# Altium PCB PeltierCore.PcbDoc
Units mil, origin at the board's own origin, x right, y up, seen from the top; angles counter-clockwise.
Board outline 6000 x 4000 mil, 2 copper layers (Top Layer, Bottom Layer); 1 components, 0 nets, 86 pads, 0 vias.
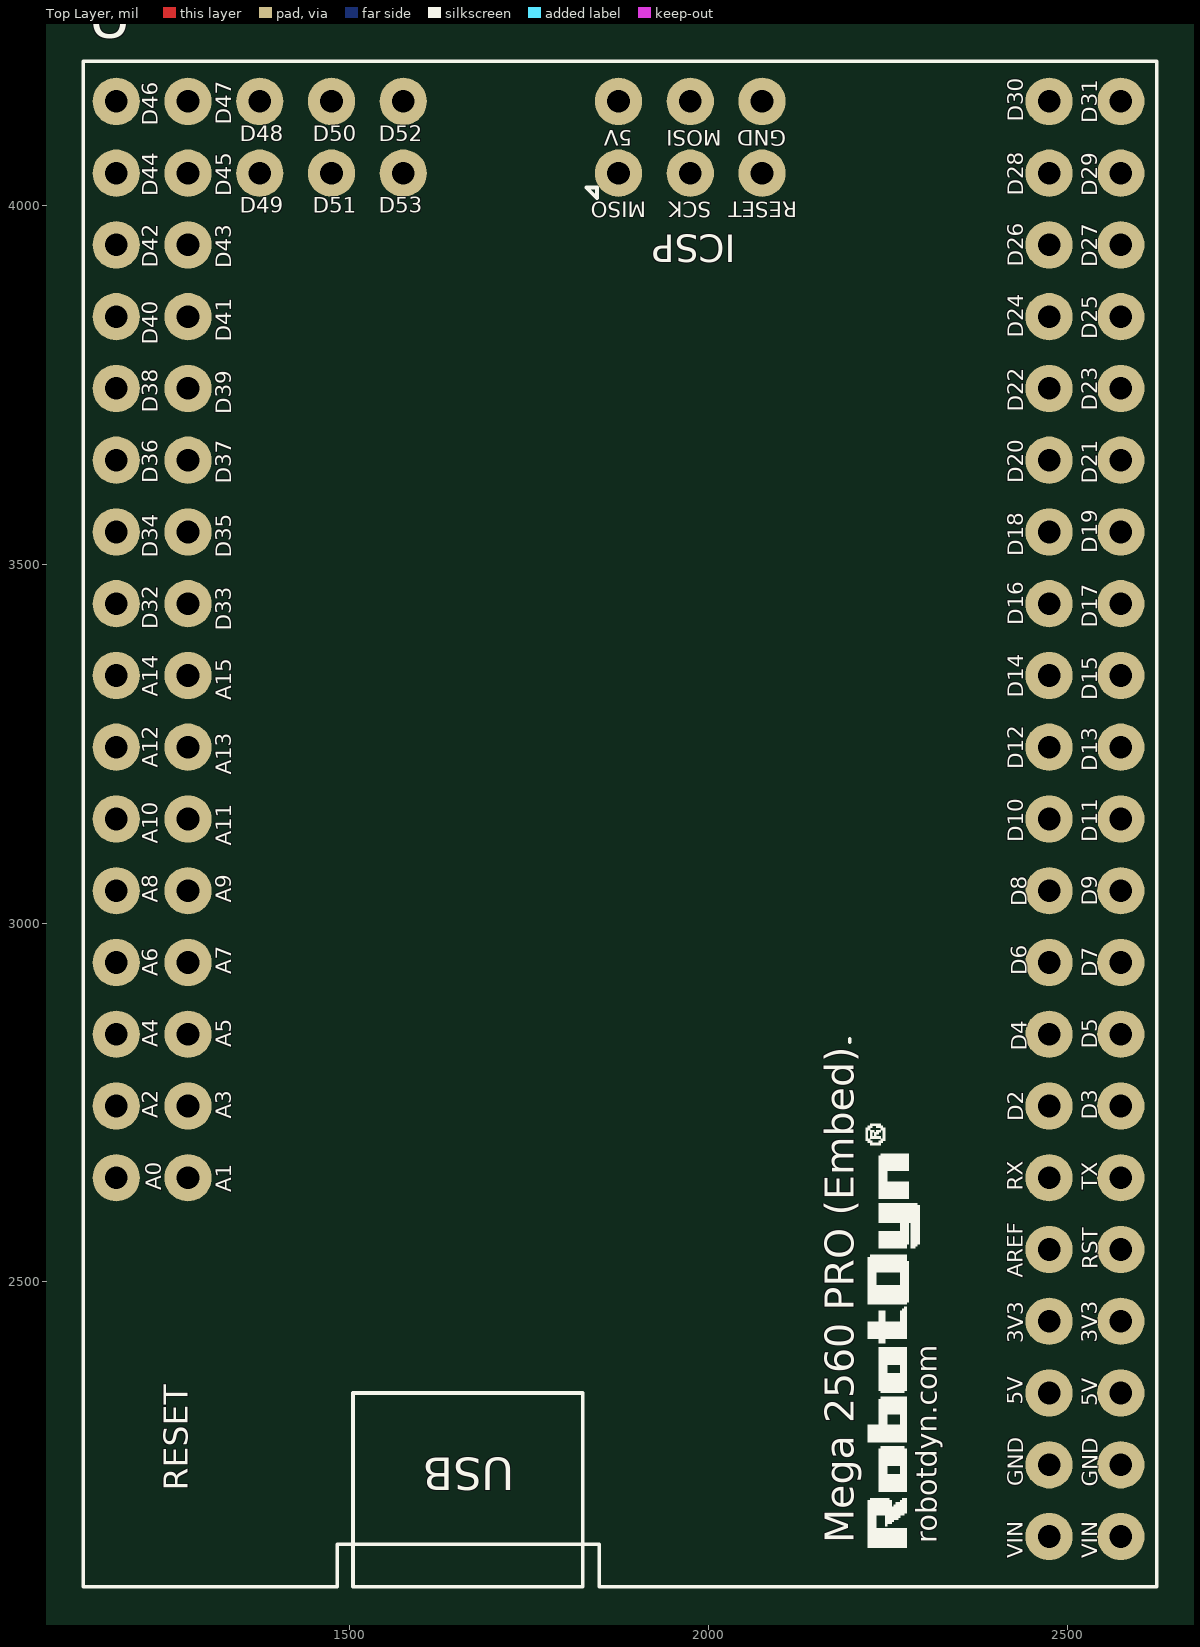
[diagram p0: Top Layer view]
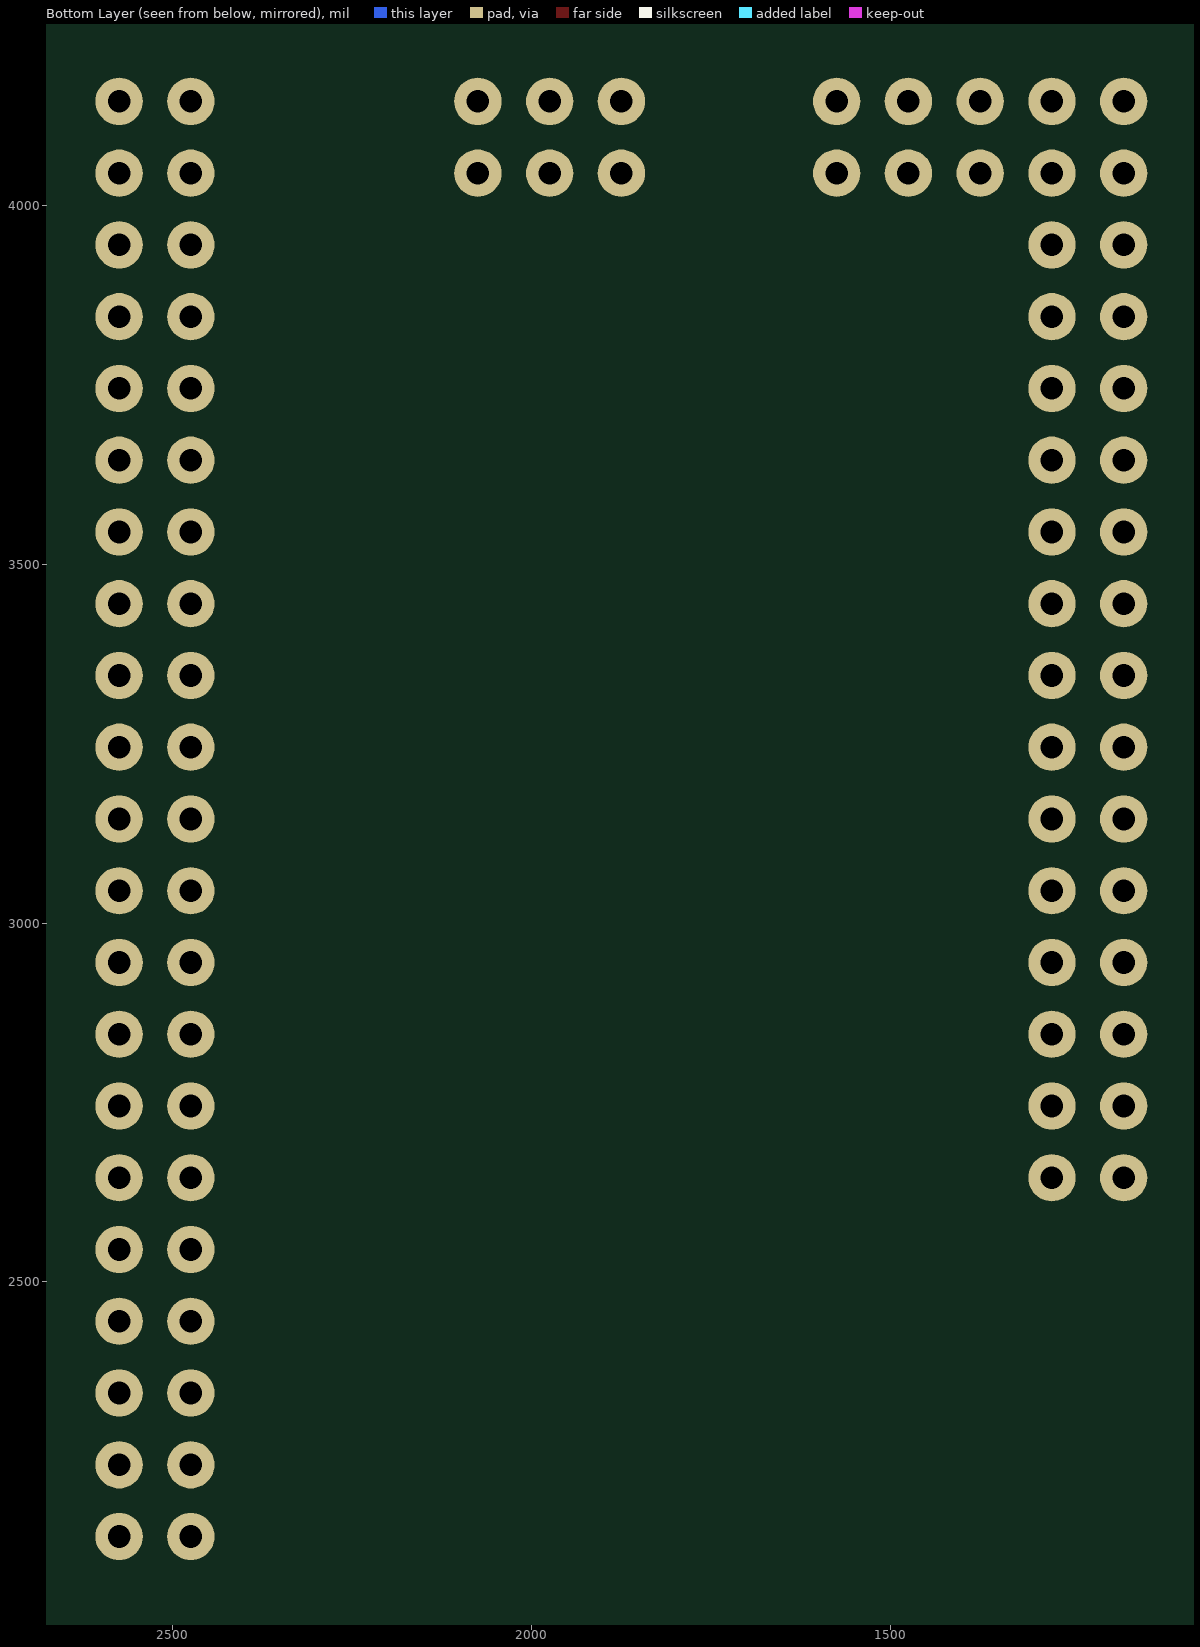
[diagram p1: Bottom Layer view, seen from below]

## Layer stack, top to bottom
Top Solder: solder mask 0.4, Solder Resist, Dk 3.5
Top Layer: signal copper 1.4
Dielectric 1: dielectric 12.6, FR-4, Dk 4.8
Bottom Layer: signal copper 1.4
Bottom Solder: solder mask 0.4, Solder Resist, Dk 3.5

## Board outline
1000,1000 7000,1000 7000,5000 1000,5000

## Design rules (kind name [scope] priority, off if disabled: settings)
Clearance [All] p1: gap=10 ignorepadtopadclearanceinfootprint=FALSE except(0: Arc-Hole Track-Hole SMDPad-Hole THPad-Hole Via-Hole Fill-Hole Poly-Hole Region-Hole Text-Hole)
PolygonConnect [All] p1: connectstyle=Relief reliefconductorwidth=10 reliefentries=4 polygonreliefangle="90 Angle" airgapwidth=10
RoutingVias [All] p1: holewidth=28 width=50 viastyle="Through Hole" minholewidth=28 minwidth=50 maxholewidth=28 maxwidth=50
SolderMaskExpansion [All] p1: expansion=4 istentingtop=FALSE
Width [All] p1: maxlimit=10 minlimit=10 preferedwidth=10
30 further rules are at their usual default settings.

## Components (designator, comment, footprint, x,y, rotation, side; value= is the part's Value field where it differs from the comment)
U* "Mega 2560 PRO (Embed) CH340G/ATmega2560-16AU" "Mega 2560 PRO (Embed)" 850,2845 r90 top

## Footprints (in the part's own frame and the unit in brackets; to place one, negate y for a bottom-side part, rotate by r counter-clockwise, add the part's x,y. Pads: shape width x height; smd on the part's side, far side on the other; paste and mask are expansions set on the pad)
"Mega 2560 PRO (Embed)" [mil]
  round 66 hole 31.5: 3V3@1(-400,-1725) 3V3@2(-400,-1625) 5V@1(-500,-1725) 5V@2(-500,-1625) 5V@3(1300,-1025) A0(-200,-325) A1(-200,-425) A2(-100,-325) A3(-100,-425) A4(0,-325) A5(0,-425) A6(100,-325) A7(100,-425) A8(200,-325) A9(200,-425) A10(300,-325) A11(300,-425) A12(400,-325) A13(400,-425) A14(500,-325) A15(500,-425) AREF(-300,-1625) D2(-100,-1625) D3(-100,-1725) D4(0,-1625) D5(0,-1725) D6(100,-1625) D7(100,-1725) D8(200,-1625) D9(200,-1725) D10(300,-1625) D11(300,-1725) D12(400,-1625) D13(400,-1725) D14(500,-1625) D15(500,-1725) D16(600,-1625) D17(600,-1725) D18(700,-1625) D19(700,-1725) D20(800,-1625) D21(800,-1725) D22(900,-1625) D23(900,-1725) D24(1000,-1625) D25(1000,-1725) D26(1100,-1625) D27(1100,-1725) D28(1200,-1625) D29(1200,-1725) D30(1300,-1625) D31(1300,-1725) D32(600,-325) D33(600,-425) D34(700,-325) D35(700,-425) D36(800,-325) D37(800,-425) D38(900,-325) D39(900,-425) D40(1000,-325) D41(1000,-425) D42(1100,-325) D43(1100,-425) D44(1200,-325) D45(1200,-425) D46(1300,-325) D47(1300,-425) D48(1300,-525) D49(1200,-525) D50(1300,-625) D51(1200,-625) D52(1300,-725) D53(1200,-725) GND@1(-600,-1725) GND@2(-600,-1625) GND@3(1300,-1225) MISO(1200,-1025) MOSI(1300,-1125) RESET(1200,-1225) RST(-300,-1725) RX(-200,-1625) SCK(1200,-1125) TX(-200,-1725) VIN@1(-700,-1725) VIN@2(-700,-1625)
  silkscreen extent -770,-1775 1356,-279

## Part data
U*: library part "Mega 2560 PRO (Embed)", "The Mega Pro Embed CH340G / ATmega2560 board is based on the ATmega2560 microcontroller and the USB-UART adapter CH340. The board is compatible with Arduino Mega 2560."

## Nets (pads, with @x,y where several pads share a name; then routed paths per layer and width w, separated by ;. In a path a pad name is that pad's centre, name@x,y a point inside that pad or via, vN(x,y) a via of type N, cw(c..) or ccw(c..) an arc to the next point about the centre after c; other vN are vias at no path point)
pads on no net: U*.3V3@1 U*.3V3@2 U*.5V@1 U*.5V@2 U*.5V@3 U*.A0 U*.A1 U*.A2 U*.A3 U*.A4 U*.A5 U*.A6 U*.A7 U*.A8 U*.A9 U*.A10 U*.A11 U*.A12 U*.A13 U*.A14 U*.A15 U*.AREF U*.D2 U*.D3 U*.D4 U*.D5 U*.D6 U*.D7 U*.D8 U*.D9 U*.D10 U*.D11 U*.D12 U*.D13 U*.D14 U*.D15 U*.D16 U*.D17 U*.D18 U*.D19 U*.D20 U*.D21 U*.D22 U*.D23 U*.D24 U*.D25 U*.D26 U*.D27 U*.D28 U*.D29 U*.D30 U*.D31 U*.D32 U*.D33 U*.D34 U*.D35 U*.D36 U*.D37 U*.D38 U*.D39 U*.D40 U*.D41 U*.D42 U*.D43 U*.D44 U*.D45 U*.D46 U*.D47 U*.D48 U*.D49 U*.D50 U*.D51 U*.D52 U*.D53 U*.GND@1 U*.GND@2 U*.GND@3 U*.MISO U*.MOSI U*.RESET U*.RST U*.RX U*.SCK U*.TX U*.VIN@1 U*.VIN@2

## Text inside footprints (layer, text, board x,y; h text height)
U*: Top Overlay "Mega 2560 PRO (Embed)" at 2202.69,2135.53 h40.15 r90; Top Overlay "robotdyn.com" at 2318.56,2135.63 h29 r90; Top Overlay "RESET" at 1274.79,2208.67 h33.46 r90; Top Overlay "USB" at 1730,2270 h77.5 r180; Top Overlay "A0" at 1237.92,2627.45 h22.1 r90; Top Overlay "A14" at 1232.92,3315.22 h22.1 r90; Top Overlay "D42" at 1232.92,3913.1 h22.1 r90; Top Overlay "D40" at 1232.92,3805.99 h22.1 r90; Top Overlay "D38" at 1232.92,3711.44 h22.1 r90; Top Overlay "D46" at 1232.92,4111.33 h22.1 r90; Top Overlay "D44" at 1232.79,4012.88 h22.1 r90; Top Overlay "A6" at 1232.92,2925.98 h22.1 r90; Top Overlay "A4" at 1232.79,2826.78 h22.1 r90; Top Overlay "A2" at 1232.92,2727.6 h22.1 r90; Top Overlay "D34" at 1232.92,3508.92 h22.1 r90; Top Overlay "D36" at 1232.92,3612.91 h22.1 r90; Top Overlay "D32" at 1232.92,3409.13 h22.1 r90; Top Overlay "A8" at 1232.92,3028.08 h22.1 r90; Top Overlay "A10" at 1232.92,3110.8 h22.1 r90; Top Overlay "A12" at 1232.92,3216.24 h22.1 r90; Top Overlay "D45" at 1335.21,4013.01 h22.1 r90; Top Overlay "D47" at 1335.21,4112.81 h22.1 r90; Top Overlay "D39" at 1335.34,3708.88 h22.1 r90; Top Overlay "D43" at 1335.34,3912.25 h22.1 r90; Top Overlay "D41" at 1335.34,3810.21 h22.1 r90; Top Overlay "A1" at 1335.34,2624.81 h22.1 r90; Top Overlay "D33" at 1335.34,3407.58 h22.1 r90; Top Overlay "A15" at 1335.34,3310.27 h22.1 r90; Top Overlay "A7" at 1335.21,2928.84 h22.1 r90; Top Overlay "A11" at 1335.34,3107.95 h22.1 r90; Top Overlay "A9" at 1335.34,3028.19 h22.1 r90; Top Overlay "A13" at 1335.34,3206.49 h22.1 r90; Top Overlay "D35" at 1335.34,3508.99 h22.1 r90; Top Overlay "D37" at 1335.34,3612.45 h22.1 r90; Top Overlay "A3" at 1335.34,2726.92 h22.1 r90; Top Overlay "A5" at 1335.21,2826.66 h22.1 r90; Top Overlay "D53" at 1541.07,3990.12 h22.1; Top Overlay "D51" at 1448.74,3990.12 h22.1; Top Overlay "D49" at 1347.27,3990.12 h22.1; Top Overlay "5V" at 1893.93,4104.88 h22.1 r180; Top Overlay "D48" at 1347.27,4089.33 h22.1; Top Overlay "D52" at 1541.07,4089.33 h22.1; Top Overlay "D50" at 1448.52,4089.33 h22.1; Top Overlay "GND" at 2108.93,4104.88 h22.1 r180; Top Overlay "MOSI" at 2018.93,4104.88 h22.1 r180; Top Overlay "MISO" at 1913.93,4004.88 h22.1 r180; Top Overlay "ICSP" at 2038.56,3959.07 h37.93 r180; Top Overlay "RESET" at 2123.93,4004.88 h22.1 r180; Top Overlay "SCK" at 2003.93,4004.88 h22.1 r180; Top Overlay "D18" at 2438.71,3511.04 h22.1 r90; Top Overlay "D6" at 2443.71,2927.36 h22.1 r90; Top Overlay "D8" at 2443.71,3023.14 h22.1 r90; Top Overlay "D10" at 2438.71,3112.9 h22.1 r90; Top Overlay "D12" at 2438.71,3214.62 h22.1 r90; Top Overlay "D14" at 2438.71,3314.05 h22.1 r90; Top Overlay "D16" at 2438.71,3415.15 h22.1 r90; Top Overlay "D20" at 2438.71,3612.91 h22.1 r90; Top Overlay "VIN" at 2438.58,2114.96 h22.1 r90; Top Overlay "D30" at 2438.71,4116.6 h22.1 r90; Top Overlay "GND" at 2439.1,2215.11 h22.1 r90; Top Overlay "5V" at 2438.58,2328.59 h22.1 r90; Top Overlay "AREF" at 2438.58,2505.52 h22.1 r90; Top Overlay "3V3" at 2438.71,2414.17 h22.1 r90; Top Overlay "D4" at 2443.58,2821.9 h22.1 r90; Top Overlay "D2" at 2438.71,2723.97 h22.1 r90; Top Overlay "D22" at 2438.71,3712.72 h22.1 r90; Top Overlay "D24" at 2438.71,3815.49 h22.1 r90; Top Overlay "D26" at 2438.71,3914.29 h22.1 r90; Top Overlay "D28" at 2438.71,4013.2 h22.1 r90; Top Overlay "RX" at 2438.58,2626.9 h22.1 r90; Top Overlay "D15" at 2542.26,3310.71 h22.1 r90; Top Overlay "D17" at 2542.26,3411.61 h22.1 r90; Top Overlay "D13" at 2542.26,3211.4 h22.1 r90; Top Overlay "D9" at 2542.26,3023.87 h22.1 r90; Top Overlay "D11" at 2542.26,3112.37 h22.1 r90; Top Overlay "D19" at 2542.26,3515.24 h22.1 r90; Top Overlay "D21" at 2542.26,3612.25 h22.1 r90; Top Overlay "D31" at 2542.26,4114.55 h22.1 r90; Top Overlay "VIN" at 2542.13,2114.93 h22.1 r90; Top Overlay "5V" at 2542.13,2326.63 h22.1 r90; Top Overlay "GND" at 2542.65,2214.34 h22.1 r90; Top Overlay "3V3" at 2542.26,2415.25 h22.1 r90; Top Overlay "RST" at 2542.65,2517.36 h22.1 r90; Top Overlay "D29" at 2542.26,4012.93 h22.1 r90; Top Overlay "D23" at 2542.26,3713.58 h22.1 r90; Top Overlay "D25" at 2542.26,3813.62 h22.1 r90; Top Overlay "D27" at 2542.26,3913.56 h22.1 r90; Top Overlay "D7" at 2542.13,2924.56 h22.1 r90; Top Overlay "D5" at 2542.13,2824.76 h22.1 r90; Top Overlay "TX" at 2542.13,2628.35 h22.1 r90; Top Overlay "D3" at 2542.26,2725.85 h22.1 r90